# Altium PCB Sensor-PCB.PcbDoc
Units mm, origin at the board's own origin, x right, y up, seen from the top; angles counter-clockwise.
Board outline 30.73 x 14 mm, 2 copper layers (Top Layer, Bottom Layer); 18 components, 13 nets, 77 pads, 32 vias.
Unrouted connection lines stored in the file: 2.
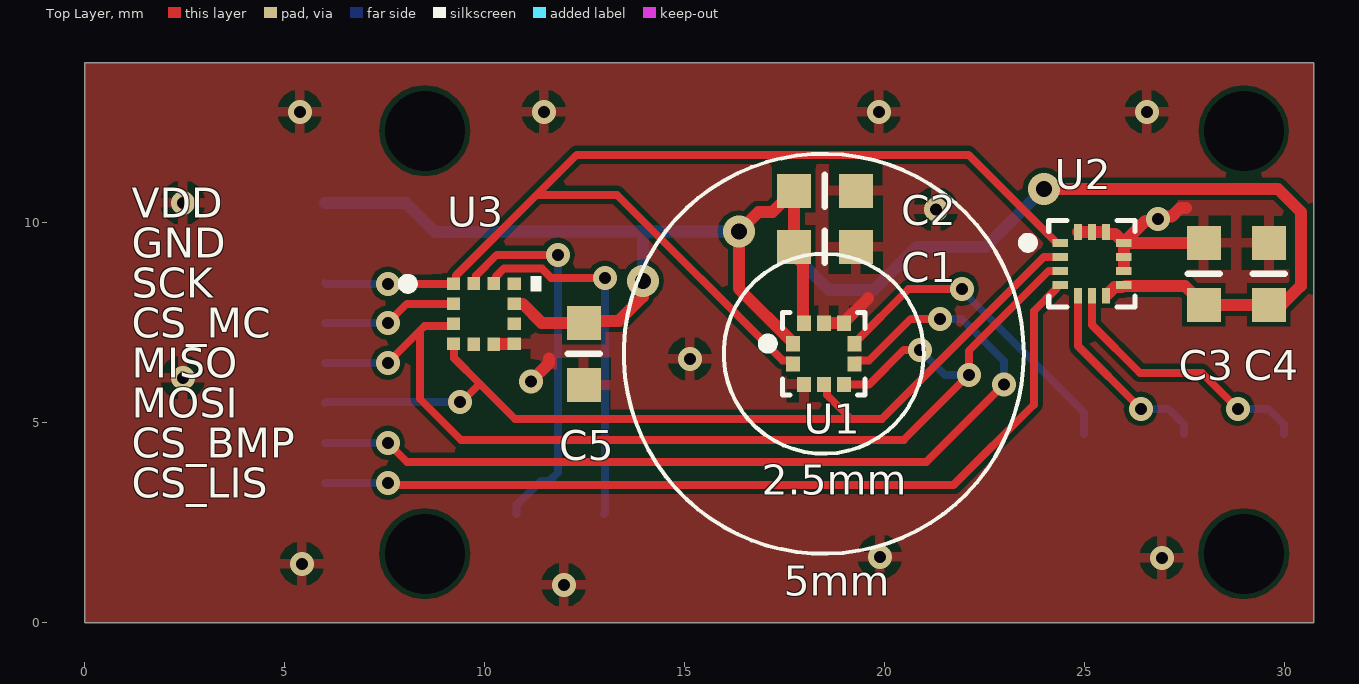
[diagram p0: Top Layer view]
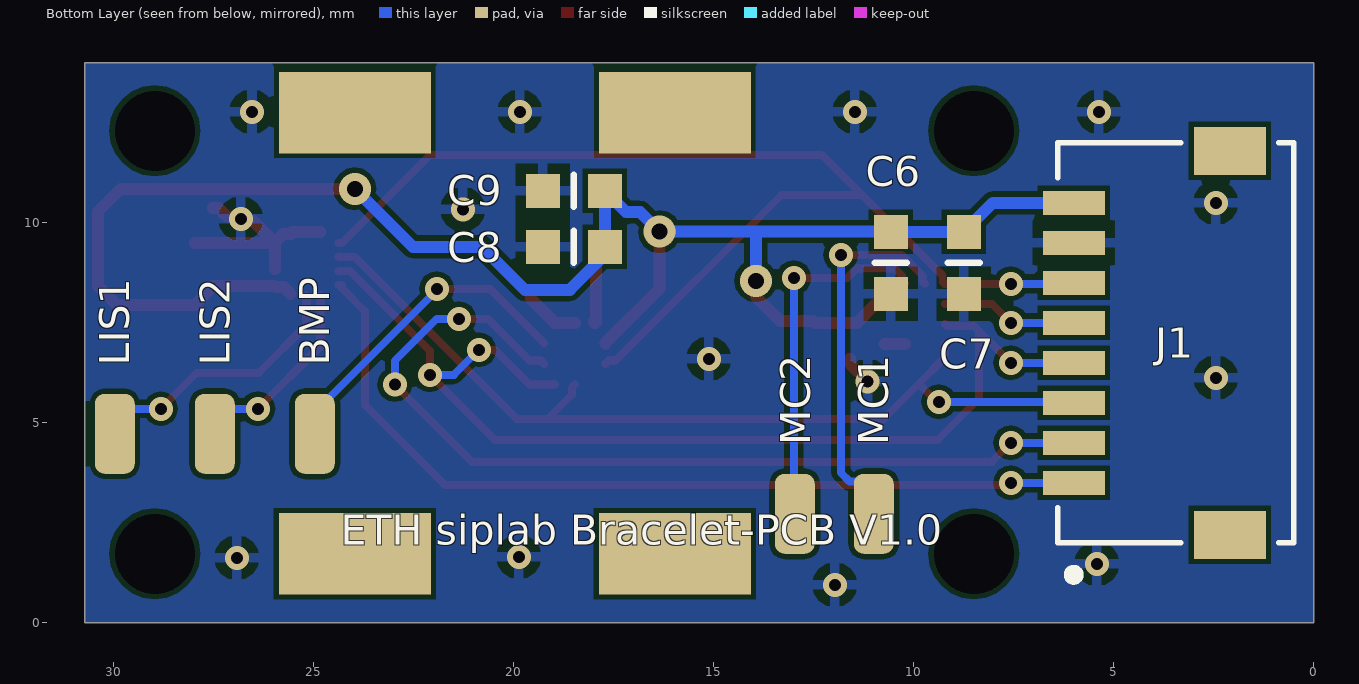
[diagram p1: Bottom Layer view, seen from below]

## Layer stack, top to bottom
Top Solder: solder mask 0.0102, Solder Resist, Dk 3.5
Top Layer: signal copper 0.0356
Dielectric 1: dielectric 0.32, FR-4, Dk 4.8
Bottom Layer: signal copper 0.0356
Bottom Solder: solder mask 0.0102, Solder Resist, Dk 3.5

## Board outline
0,0 30.725,0 30.725,14 0,14

## Design rules (kind name [scope] priority, off if disabled: settings)
Clearance [All] p1: gap=0.127 ignorepadtopadclearanceinfootprint=FALSE except(0: Arc-Hole Track-Hole SMDPad-Hole THPad-Hole Via-Hole Fill-Hole Poly-Hole Region-Hole Text-Hole)
PolygonConnect [All] p1: connectstyle=Relief reliefconductorwidth=0.254 reliefentries=4 polygonreliefangle="90 Angle" airgapwidth=0.254
RoutingVias [All] p1: holewidth=0.3 width=0.6 viastyle="Through Hole" minholewidth=0.2 minwidth=0.4 maxholewidth=6.3 maxwidth=7
SolderMaskExpansion [All] p1: expansion=0.102
UnpouredPolygon [All] p1: allowunpoured=TRUE allowshelved=TRUE
Width [All] p1: maxlimit=0.4 minlimit=0.127 preferedwidth=0.3 minimp=50.000000 maximp=50.000000 favimp=50.000000
29 further rules are at their usual default settings.

## Components (designator, comment, footprint, x,y, rotation, side; value= is the part's Value field where it differs from the comment)
BMP "pad" "pad rect 1.5x3mm - duplicate"#1 18.975,2.425 r0 top (schematic designator J2)
C1 "0.10µF" SMD-0603C 18.5,9.4 r90 top
C2 "0.10µF" SMD-0603C 18.5,10.8 r90 top
C3 "0.10µF" SMD-0603C 27.975,8.725 r180 top
C4 "10µF" SMD-0603C 29.6,8.725 r180 top
C5 "0.10µF" SMD-0603C 12.475,6.725 r0 top
C6 "22µF" SMD-0603C 10.575,9 r0 bottom
C7 "0.10µF" SMD-0603C 8.75,9 r0 bottom
C8 "0.10µF" SMD-0603C 18.5,9.4 r270 bottom
C9 "0.10µF" SMD-0603C 18.5,10.8 r270 bottom
J1 "2023960807" CON_2023960807 6,3.5 r90 bottom
LIS1 "pad" "pad rect 1.5x3mm - duplicate"#2 40.975,6.625 r0 top (schematic designator J3)
LIS2 "pad" "pad rect 1.5x3mm - duplicate"#3 38.311,6.622 r0 top (schematic designator J4)
MC1 "pad" "pad rect 1.5x3mm - duplicate"#4 10.623,2.725 r90 bottom (schematic designator J5)
MC2 "pad" "pad rect 1.5x3mm - duplicate"#5 7.525,1.124 r0 top (schematic designator J6)
U1 "BMP388" *PQFN50P200X200X80-10N 18.475,6.725 r0 top
U2 "LIS2DHTR" *PQFN35P200X200X100-14N 25.18,8.975 r0 top
U3 "MC3479" MC3479_MEM 9.975,7.725 r0 top

## Footprints (in the part's own frame and the unit in brackets; to place one, negate y for a bottom-side part, rotate by r counter-clockwise, add the part's x,y. Pads: shape width x height; smd on the part's side, far side on the other; paste and mask are expansions set on the pad)
*PQFN35P200X200X100-14N [mm]
  rect 0.39x0.2 smd: 1(-0.795,0.525) 2(-0.795,0.175) 3(-0.795,-0.175) 4(-0.795,-0.525) 8(0.795,-0.525) 9(0.795,-0.175) 10(0.795,0.175) 11(0.795,0.525)
  rect 0.2x0.39 smd: 5(-0.35,-0.795) 6(0,-0.795) 7(0.35,-0.795) 12(0.35,0.795) 13(0,0.795) 14(-0.35,0.795)
  silkscreen extent -1.7,-1.08 1.08,1.08, body extent -1.07,-1.07 1.07,1.07, height 1
*PQFN50P200X200X80-10N [mm]
  rect 0.35x0.38 smd: 1(-0.765,0.252) 2(-0.765,-0.252) 3(-0.5,-0.765) 4(0,-0.765) 5(0.5,-0.765) 6(0.765,-0.252) 7(0.765,0.252) 8(0.5,0.765) 9(0,0.765) 10(-0.5,0.765)
  silkscreen extent -1.5,-1.03 1.03,1.03, body extent -1,-1 1,1, height 0.8
CON_2023960807 [mm]
  rect 0.6x1.55 smd paste+0 mask+0.076: 1(0,0) 2(1,0) 3(2,0) 4(3,0) 5(4,0) 6(5,0) 7(6,0) 8(7,0)
  rect 1.2x1.8 smd paste+0 mask+0.076: 9(-1.3,-3.9) 10(8.3,-3.9)
  silkscreen extent -2.4,-5.5 8.5,0.4, body extent 0,0 0.25,0.25, height 0.25
MC3479_MEM [mil]
  rect 13x12 smd paste+0 mask+0: 1(-29.92,29.53) 2(-29.92,9.84) 3(-29.92,-9.84) 4(-29.92,-29.53) 7(29.92,-29.53) 8(29.92,-9.84) 9(29.92,9.84) 10(29.92,29.53)
  rect 12x13 smd paste+0 mask+0: 5(-9.84,-29.92) 6(9.84,-29.92) 11(9.84,29.92) 12(-9.84,29.92)
  silkscreen extent -79,22 56,37, body extent -39,-39 39,39, height 39
"pad rect 1.5x3mm - duplicate"#1 [mm]
  rrect50% 1x2 smd far side: 1(6,2.3)
"pad rect 1.5x3mm - duplicate"#2 [mm]
  rrect50% 1x2 smd far side: 1(-11,-1.9)
"pad rect 1.5x3mm - duplicate"#3 [mm]
  rrect50% 1x2 smd far side: 1(-10.836,-1.897)
"pad rect 1.5x3mm - duplicate"#4 [mm]
  rrect50% 2x1 smd: 1(0,0.377)
"pad rect 1.5x3mm - duplicate"#5 [mm]
  rrect50% 1x2 smd far side: 1(5.45,1.601)
SMD-0603C [mm]
  rect 0.85x0.85 smd: 1(0,0.775) 2(0,-0.775)
  silkscreen extent -0.4,0 0.4,0, body extent -0.4,-0.8 0.4,0.8, height 0.9

## Part data
C1 C2 C3 C5 C7 C8 C9: library part GCJ188R71C104KA01D, "CAP CER 0.1UF 16V X7R 0603", Digi-Key Part Number=490-5796-1-ND, Manufacturer="Murata Electronics North America", Operating Temperature="-55°C ~ 125°C", Package / Case="0603 (1608 Metric)", Ratings=AEC-Q200, Temperature Coefficient=X7R, Tolerance=±10%, Voltage=16V, @ qty=0, Applications="Automotive, Boardflex Sensitive", Datasheets=http://www.murata.com/~/media/webrenewal/support/library/catalog/products/capacitor/mlcc/c03e.ashx, Factory Stock=0, Features="Soft Termination", Height - Seated (Max)=-, Image=//media.digikey.com/Renders/Murata%20Renders/0603%28LQG18%29.jpg, Lead Spacing=-, Lead Style=-, Minimum Quantity=1, Mounting Type="Surface Mount, MLCC", Packaging="Cut Tape (CT)", Part Number=GCJ188R71C104KA01D, Part Status=Active, Quantity Available=22473, Series=GCJ, Size / Dimension="0.063\" L x 0.031\" W (1.60mm x 0.80mm)", Thickness (Max)="0.035\" (0.90mm)", Unit Price (USD)=0.21
C4: library part GRM188C81A106MA73D, "CAP CER 10UF 10V X6S 0603", Digi-Key Part Number=490-7197-1-ND, Manufacturer="Murata Electronics North America", Operating Temperature="-55°C ~ 105°C", Package / Case="0603 (1608 Metric)", Ratings=-, Temperature Coefficient=X6S, Tolerance=±20%, Voltage=10V, @ qty=0, Applications="General Purpose", Datasheets=http://www.murata.com/~/media/webrenewal/support/library/catalog/products/capacitor/mlcc/c02e.pdf, Factory Stock=0, Features=-, Height - Seated (Max)=-, Image=//media.digikey.com/Renders/Murata%20Renders/ZRB-SERIES-0402.jpg, Lead Spacing=-, Lead Style=-, Minimum Quantity=1, Mounting Type="Surface Mount, MLCC", Packaging="Cut Tape (CT)", Part Number=GRM188C81A106MA73D, Part Status=Active, Quantity Available=213983, Series=GRM, Size / Dimension="0.063\" L x 0.031\" W (1.60mm x 0.80mm)", Thickness (Max)="0.031\" (0.80mm)", Unit Price (USD)=0.34
C6: library part GRM188R61A226ME15D, "CAP CER 22UF 10V X5R 0603", Digi-Key Part Number=490-10476-1-ND, Manufacturer="Murata Electronics North America", Operating Temperature="-55°C ~ 85°C", Package / Case="0603 (1608 Metric)", Ratings=-, Temperature Coefficient=X5R, Tolerance=±20%, Voltage=10V, @ qty=0, Applications="General Purpose", Datasheets=http://www.murata.com/~/media/webrenewal/support/library/catalog/products/capacitor/mlcc/c02e.pdf, Factory Stock=0, Features="Derating Recommended", Height - Seated (Max)=-, Image=//media.digikey.com/Renders/Murata%20Renders/ZRB-SERIES-0402.jpg, Lead Spacing=-, Lead Style=-, Minimum Quantity=1, Mounting Type="Surface Mount, MLCC", Packaging="Cut Tape (CT)", Part Number=GRM188R61A226ME15D, Part Status=Active, Quantity Available=179406, Series=GRM, Size / Dimension="0.063\" L x 0.031\" W (1.60mm x 0.80mm)", Thickness (Max)="0.039\" (1.00mm)", Unit Price (USD)=0.24
J1: "No Description Available", Mfr_Name="Molex Connector Corporation", Copyright="Copyright (C) 2021 Ultra Librarian. All rights reserved.", Manufacturer_Part_Number=2023960807, RefDes=RefDes, Type=DEV
U1: "P-Sensor SPI I2C 1, 25 Bar SMD", Package="WFLGA-10 Bosch Tools", Digi-Key_Part_Number=828-1079-1-ND, Digi-Key_Purchase_URL=https://www.digikey.ch/product-detail/en/bosch-sensortec/BMP388/828-1079-1-ND/8322640?utm_source=snapeda&utm_medium=aggregator&utm_campaign=symbol, MF="Bosch Sensortec", MP=BMP388, SnapEDA_Link=https://www.snapeda.com/parts/BMP388/Bosch%20Sensortec/view-part/?ref=snap
U2: "ACCEL 2-16G I2C/SPI 14LGA", Digi-Key Part Number=497-13795-1-ND, Manufacturer=STMicroelectronics, Package / Case=LGA-14, Digi-Key_Purchase_URL=https://www.digikey.ch/product-detail/en/stmicroelectronics/LIS2DHTR/497-13795-1-ND/4209308?utm_source=snapeda&utm_medium=aggregator&utm_campaign=symbol, Part Number=LIS2DHTR, SnapEDA_Link=https://www.snapeda.com/parts/LIS2DHTR/STMicroelectronics/view-part/45205/?ref=snap
U3: "No Description Available", Mfr_Name=Memsic, Copyright="Copyright (C) 2021 Ultra Librarian. All rights reserved.", Manufacturer_Part_Number=MC3479, RefDes=RefDes, Type=DEV

## Free pads (board coordinates)
  round 1.524 hole 2 unplated: 1(8.5,12.3) 2(28.975,12.3) 3(8.5,1.725) 4(28.975,1.725)
  rect 3.8x2.03 smd far side: 5(15.975,12.75) 6(23.975,12.75) 7(15.975,1.725) 8(23.975,1.725)

## Via types
v1: diameter 0.6, hole 0.3, Top Layer to Bottom Layer, 29 vias
v2: diameter 0.8, hole 0.4, Top Layer to Bottom Layer, 3 vias

## Nets (pads, with @x,y where several pads share a name; then routed paths per layer and width w, separated by ;. In a path a pad name is that pad's centre, name@x,y a point inside that pad or via, vN(x,y) a via of type N, cw(c..) or ccw(c..) an arc to the next point about the centre after c; other vN are vias at no path point)
GND: C1.2 C2.2 C3.2 C4.2 C5.2 C6.1 C7.1 C8.2 C9.2 J1.7 U1.3 U1.8 U1.9 U2.9 U2.10 U2.11 U2.12 U2.13 U2.14 U3.6 U3.7 | length 8.4
  Top Layer w0.3: U3.6 10.225,6.97 10.227,6.973 U3.7 U3.7 ; v1(11.154,6.036) 11.6,6.482 11.6,6.601 ; U1.9 U1.8 18.975,7.505 19.585,8.115 ; U2.14 U2.12 25.575,9.725 25.755,9.725 U2.11@25.93,9.55 ; U2.9@25.975,8.85 U2.10 U2.11@25.975,9.45 ; 27.525,10.375 27.389,10.375 27.171,10.157 26.882,10.157 v1(26.825,10.1) 26.768,10.043 26.513,10.043 25.975,9.505 U2.11 C3.2
  other v1: 11.975,0.95 5.425,1.475 26.925,1.625 19.875,1.65 2.45,6.125 15.125,6.6 21.275,10.336 2.45,10.5 5.375,12.775 11.475,12.775 19.85,12.775 26.55,12.775
NetJ1_1: J1.1 U2.4 | length 21.9
  Top Layer w0.2: v1(7.575,3.5) 7.632,3.443 21.718,3.443 23.725,5.45 23.725,7.79 24.29,8.355 24.29,8.45 U2.4
  Bottom Layer w0.2: J1.1 v1(7.575,3.5)
NetJ1_2: J1.2 U1.6 | length 23.2
  Top Layer w0.2: v1(7.575,4.5) 8.05,4.025 21.045,4.025 v1(22.975,5.955) ; U1.6 19.24,6.485 19.315,6.56 19.61,6.56 20.65,7.6 v1(21.375,7.6)
  Bottom Layer w0.2: J1.2 v1(7.575,4.5) ; v1(21.375,7.6) 21.925,7.6 22.975,6.55 v1(22.975,5.955)
NetJ1_3: J1.3 U1.4 U2.2 U3.4 | length 23
  Top Layer w0.2: U3.4 9.228,6.975 9.228,6.622 9.875,5.975 ; v1(9.375,5.525) 9.425,5.525 9.875,5.975 ; U1.4 18.55,5.885 18.55,5.699 19.074,5.175 19.149,5.1 ; U2.2 23.982,9.15 19.932,5.1 19.149,5.1 ; 9.875,5.975 10.75,5.1 19.149,5.1
  Bottom Layer w0.2: J1.3 6.025,5.525 v1(9.375,5.525)
NetJ1_4: J1.4 U1.5 U2.3 U3.3 | length 27.6
  Top Layer w0.2: v1(7.575,6.5) 8.375,7.3 ; U3.3 9.163,7.423 8.498,7.423 8.375,7.3 ; U1.5 19.61,5.96 20.475,6.825 v1(20.875,6.825) ; U2.3 24.1,8.8 22.1,6.8 v1(22.1,6.2) 20.475,4.575 9.4,4.575 8.375,5.6 8.375,7.3
  Bottom Layer w0.2: J1.4 v1(7.575,6.5) ; v1(20.875,6.825) 21.5,6.2 v1(22.1,6.2)
NetJ1_5: J1.5 U3.2 | length 3.4
  Top Layer w0.2: v1(7.575,7.5) 8.05,7.975 U3.2
  Bottom Layer w0.2: J1.5 v1(7.575,7.5)
NetJ1_6: J1.6 U1.2 U2.1 U3.1 | length 28.9
  Top Layer w0.2: v1(7.575,8.475) 8.671,8.475 U3.1 9.228,8.475 9.28,8.527 9.28,8.679 11.302,10.7 ; U1.2 17.71,6.485 17.635,6.56 17.441,6.56 13.301,10.7 11.302,10.7 ; U2.1 24.29,9.5 22.09,11.7 12.302,11.7 11.302,10.7
  Bottom Layer w0.2: J1.6 6.025,8.475 v1(7.575,8.475)
NetJ2_1: BMP.1 U1.7 | length 8.2
  Top Layer w0.2: U1.7 19.24,6.992 20.598,8.35 v1(21.925,8.35)
  Bottom Layer w0.2: v1(21.925,8.35) 21.925,8.313 24.975,5.263 BMP.1
NetJ3_1: LIS1.1 U2.6 | length 6.8
  Top Layer w0.2: U2.6 25.18,7.445 26.375,6.25 27.925,6.25 v1(28.825,5.35)
  Bottom Layer w0.2: v1(28.825,5.35) 29.586,5.35 29.975,4.961 LIS1.1
NetJ4_1: LIS2.1 U2.5 | length 5
  Top Layer w0.2: U2.5 24.83,6.92 v1(26.4,5.35)
  Bottom Layer w0.2: v1(26.4,5.35) 27.086,5.35 27.475,4.961 LIS2.1
NetJ5_1: MC1.1 U3.12 | length 9.5
  Top Layer w0.2: U3.12 9.777,8.537 9.777,8.676 10.301,9.2 v1(11.825,9.2)
  Bottom Layer w0.2: MC1.1@10.799,2.725 10.799,2.943 11.389,3.532 11.606,3.532 11.825,3.751 v1(11.825,9.2)
NetJ6_1: MC2.1 U3.11 | length 9
  Top Layer w0.2: U3.11 10.277,8.537 10.277,8.656 10.476,8.854 11.425,8.854 11.655,8.625 v1(13,8.625)
  Bottom Layer w0.2: MC2.1 13,2.75 v1(13,8.625)
VDD: C1.1 C2.1 C3.1 C4.1 C5.1 C6.2 C7.2 C8.1 C9.1 J1.8 U1.1 U1.10 U2.7 U2.8 U3.9 | length 49.3
  Top Layer w0.3: U3.9 10.737,7.973 10.947,7.973 11.419,7.5 C5.1 12.525,7.55 13.35,7.55 13.95,8.15 v2(13.95,8.55) ; U1.1 17.71,6.992 16.352,8.35 v2(16.352,9.777) 16.847,10.272 17.197,10.272 C2.1 C1.1 17.725,9.2 17.95,8.975 U1.10@17.95,7.515 ; U1.10 U1.10@18,7.515 ; v2(23.975,10.85) 29.825,10.85 30.4,10.275 30.4,8.425 29.925,7.95 C4.1 C3.1 27.502,8.423 U2.8@26.02,8.423 ; U2.7@25.58,8.225 25.745,8.39 U2.8@25.92,8.39
  Bottom Layer w0.3: J1.8 8.025,10.5 C7.2 C6.2 10.577,9.777 13.95,9.777 ; v2(13.95,8.55) 13.95,9.777 ; v2(23.975,10.85) 22.525,9.4 20.8,9.4 19.725,8.325 18.6,8.325 17.725,9.2 C8.1 C9.1 17.197,10.272 16.847,10.272 v2(16.352,9.777) 13.95,9.777
pads on no net: J1.9 J1.10 U3.5 U3.8 U3.10

## Polygon pours and split planes (outlines as drawn)
GND on Top Layer "Top_GND" (solid, pour order 0): 0,0 30.725,0 30.725,14 0,14
GND on Bottom Layer "Bottom_GND" (solid, pour order 2): 0,0 30.725,0 30.725,14 0,14

## Other copper
Top Layer:
  region: -10.625,31.425

## Silkscreen, mask and mechanical layers (free items; w line width, h text height)
Top Overlay:
  circle w0.1: c18.475,6.725 r2.5
  circle w0.1: c18.475,6.725 r5
  text "VDD" at 1.175,10.125 h0.75
  text "GND" at 1.175,9.125 h0.75
  text "SCK" at 1.175,8.125 h0.75
  text "CS_MC" at 1.175,7.125 h0.75
  text "MISO" at 1.175,6.125 h0.75
  text "MOSI" at 1.175,5.125 h0.75
  text "CS_BMP" at 1.175,4.125 h0.75
  text "2.5mm" at 16.925,3.2 h0.75
  text "CS_LIS" at 1.175,3.125 h0.75
  text "5mm" at 17.475,0.675 h0.75
Bottom Overlay:
  text "ETH siplab Bracelet-PCB V1.0" at 24.325,1.95 h0.75
Mechanical 3:
  the board outline again, w0.01

## Text inside footprints (layer, text, board x,y; h text height)
U3: Mechanical 13 "*" at 9.063,8.09 h1.27